# EAGLE board brick_serial_phonejack (EAGLE 7.2.0)
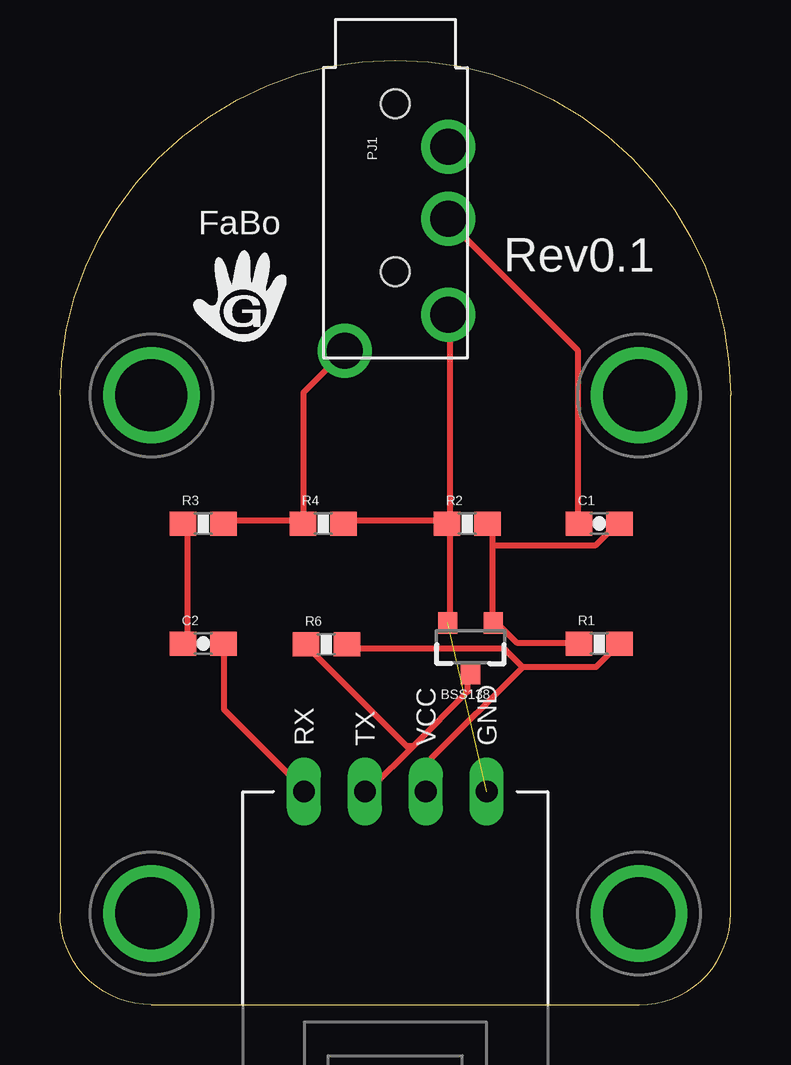
[diagram p0: board, top side]
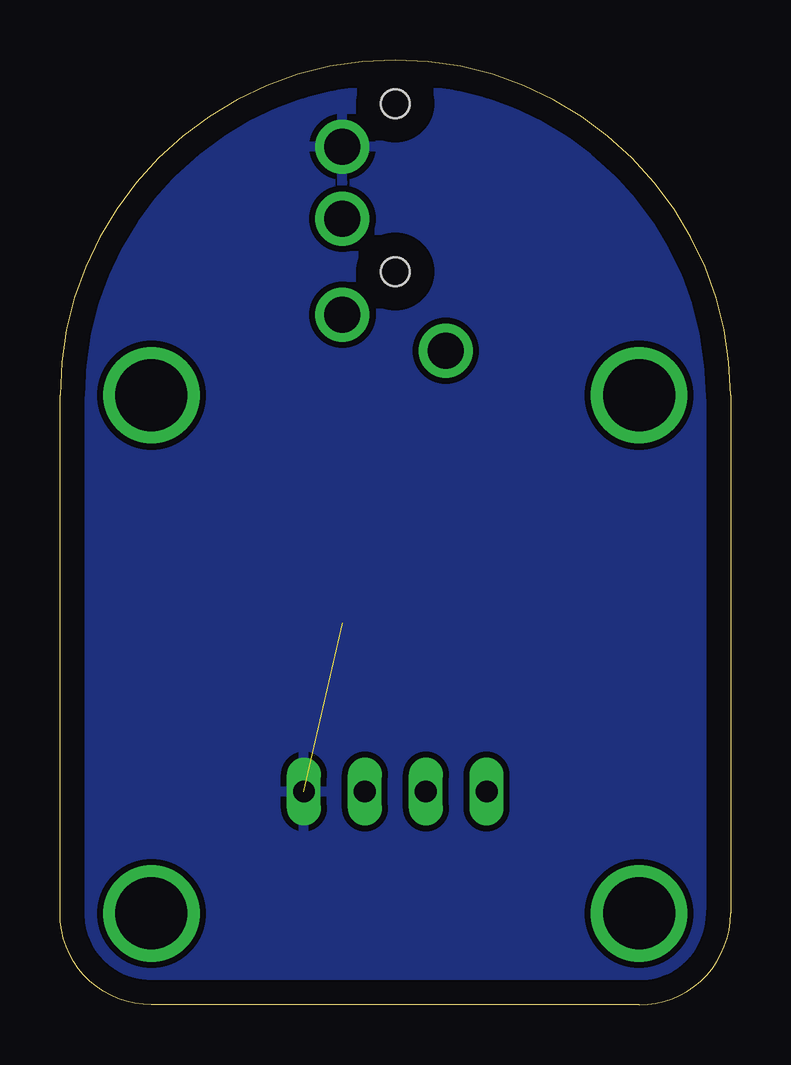
[diagram p1: board, bottom side, seen from below]

Size 27.94 x 39.37 mm. Coordinates in mm from the lower left corner, seen from the top.
Copper layers (1*16): Top 0.035mm / dielectric 1.5mm / Bottom 0.035mm
Design rules "default": minimum track width 10mil, minimum drill 24mil, track to track 8mil, track to pad 8mil, pad to pad 8mil, via to via 8mil, smd to smd 8mil, copper to edge 40mil, drill to drill 8mil, minimum pad ring 10mil, minimum via ring 8mil, stop-mask expansion 4mil, vias tented up to drill 0mil, thermal gap 10mil
Net classes: 0 default: width 0.254 mm, clearance 0.254 mm; 2 gnd: width 0.305 mm, drill 0.559 mm, clearance 0.254 mm; 3 usbvcc: width 0.508 mm, drill 0.61 mm, clearance 0.254 mm

## Footprints (pad centres in the part's own frame; a part is rotated, then mirrored left to right if it is on the bottom)
SOT23-3 = smd 0.8 x 0.9: 1 -0.95,-1; 2 0.95,-1; 3 0,1.1
EIA0603-CAP = smd 1.1 x 1: 1 -0.85,0; 2 0.85,0
BRICK_SERIAL = drill 0.9 long: GND 3.81,-10.16; RX -3.81,-10.16; TX -1.27,-10.16; VCC 1.27,-10.16 | drill 3 pad 3.81: P$5 -10.16,6.35; P$6 10.16,6.35; P$7 -10.16,-15.24; P$8 10.16,-15.24
PHONEJACK-MJ-4PP-9 = drill 1.5: A 5.8,-2.1; B -2.7,2.2; C 0.3,2.2; D 4.3,2.2 | hole 1.2: -4.5,0; 2.5,0
EIA0603-RES = smd 1.1 x 1: 1 -0.85,0; 2 0.85,0
0603-RES = smd 1.1 x 1: 1 -0.85,0; 2 0.85,0

## Placement (x,y rotation side)
BSS138  [SOT23-3]  17.1,14.92 180 top
C1  1u  [EIA0603-CAP]  22.47,20.05 0 top
C2  1u  [EIA0603-CAP]  5.97,15.05 0 top
J1  0  [BRICK_SERIAL]  13.97,19.05 0 top
PJ1  MJ-4PP-9  [PHONEJACK-MJ-4PP-9]  13.97,33.05 270 top
R1  100k  [EIA0603-RES]  22.47,15.05 0 top
R2  22k  [EIA0603-RES]  16.97,20.05 0 top
R3  5.1k  [EIA0603-RES]  5.97,20.05 0 top
R4  3.3k  [EIA0603-RES]  10.97,20.05 0 top
R6  10K  [0603-RES]  11.1,15.02 0 top
U$1  [LOGO_FABO_M]  7.47,29.55 0 top

## Library data of the parts
BSS138 R6 = SparkFun
C1 C2 J1 R1-R4 U$1 = gclue
PJ1 = gclueParts

## Nets
+5V: J1.VCC R1.2 R6.2
GND: BSS138.2 J1.GND PJ1.B R2.1 R4.2
MIC: PJ1.A R3.2 R4.1
N$1: C2.1 R3.1
N$2: C1.1 PJ1.C
N$3: PJ1.D
RX: C2.2 J1.RX
TX_HV: BSS138.3 J1.TX R6.1
TX_LV: BSS138.1 C1.2 R1.1 R2.2

## Tracks (layer width: path | path; a pad name or v marks a point on that pad's centre or on a via)
+5V
  Top 0.254: 19.28,14.08 18.52,14.84 12.17,14.84 R6.2 | 19.28,14.08 22.33,14.08 23.09,14.84 R1.2 | 19.28,14.08 15.47,10.27 15.47,9 J1.VCC
GND  (1 unrouted)
  Top 0.254: BSS138.2 16.23,16.11 16.23,19.92 R2.1 | R4.2 11.92,20.17 15.98,20.17 R2.1 | 16.23,28.55 16.23,20.17 R2.1
  pour Bottom: -2.03,-3.95 -2.03,42.05 28.97,42.05 28.97,-3.95
MIC
  Top 0.254: R3.2 6.84,20.17 9.88,20.17 R4.1 10.14,20.17 10.14,25.51 11.66,27.03 PJ1.A
N$1
  Top 0.254: C2.1 5.31,15.09 5.31,19.92 R3.1
N$2
  Top 0.254: C1.1 21.57,20.17 21.57,27.28 16.23,32.62 PJ1.C
RX
  Top 0.254: C2.2 6.84,14.84 6.84,12.3 10.14,9 J1.RX
TX_HV
  Top 0.254: 14.71,10.77 12.93,9 J1.TX | 14.71,10.77 17,13.06 17,13.57 BSS138.3 | 14.71,10.77 14.46,10.77 10.39,14.84 R6.1
TX_LV
  Top 0.254: 18.01,19.16 18.01,19.92 R2.2 | 18.01,19.16 18.01,16.11 BSS138.1 18.27,15.85 19.03,15.09 21.57,15.09 R1.1 | 18.01,19.16 22.33,19.16 23.09,19.92 C1.2

## Text on the board
tPlace: Rev0.1